# Altium PCB Logger_PCB_6.PcbDoc (part 1 of 2)
Units mm, origin at the board's own origin, x right, y up, seen from the top; angles counter-clockwise.
Board outline 91.13 x 59.14 mm, 2 copper layers (Top Layer, Bottom Layer); 117 components, 70 nets, 364 pads, 397 vias.
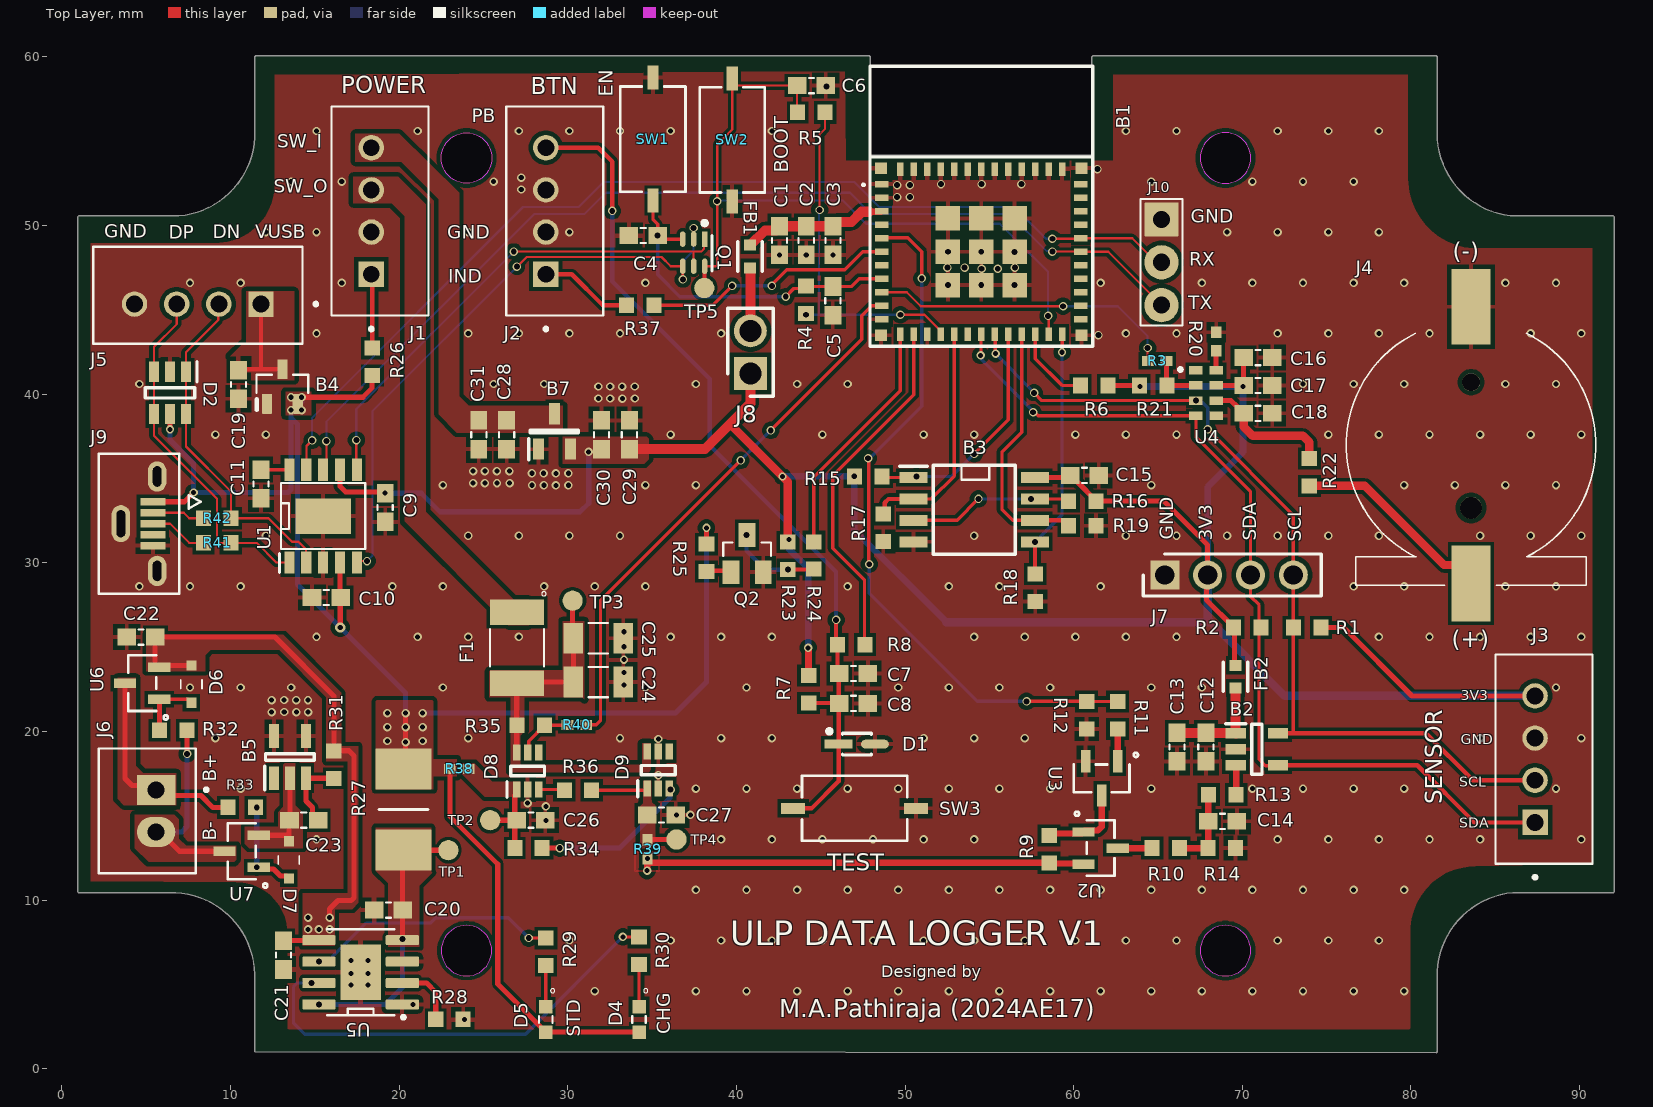
[diagram p0: Top Layer view]
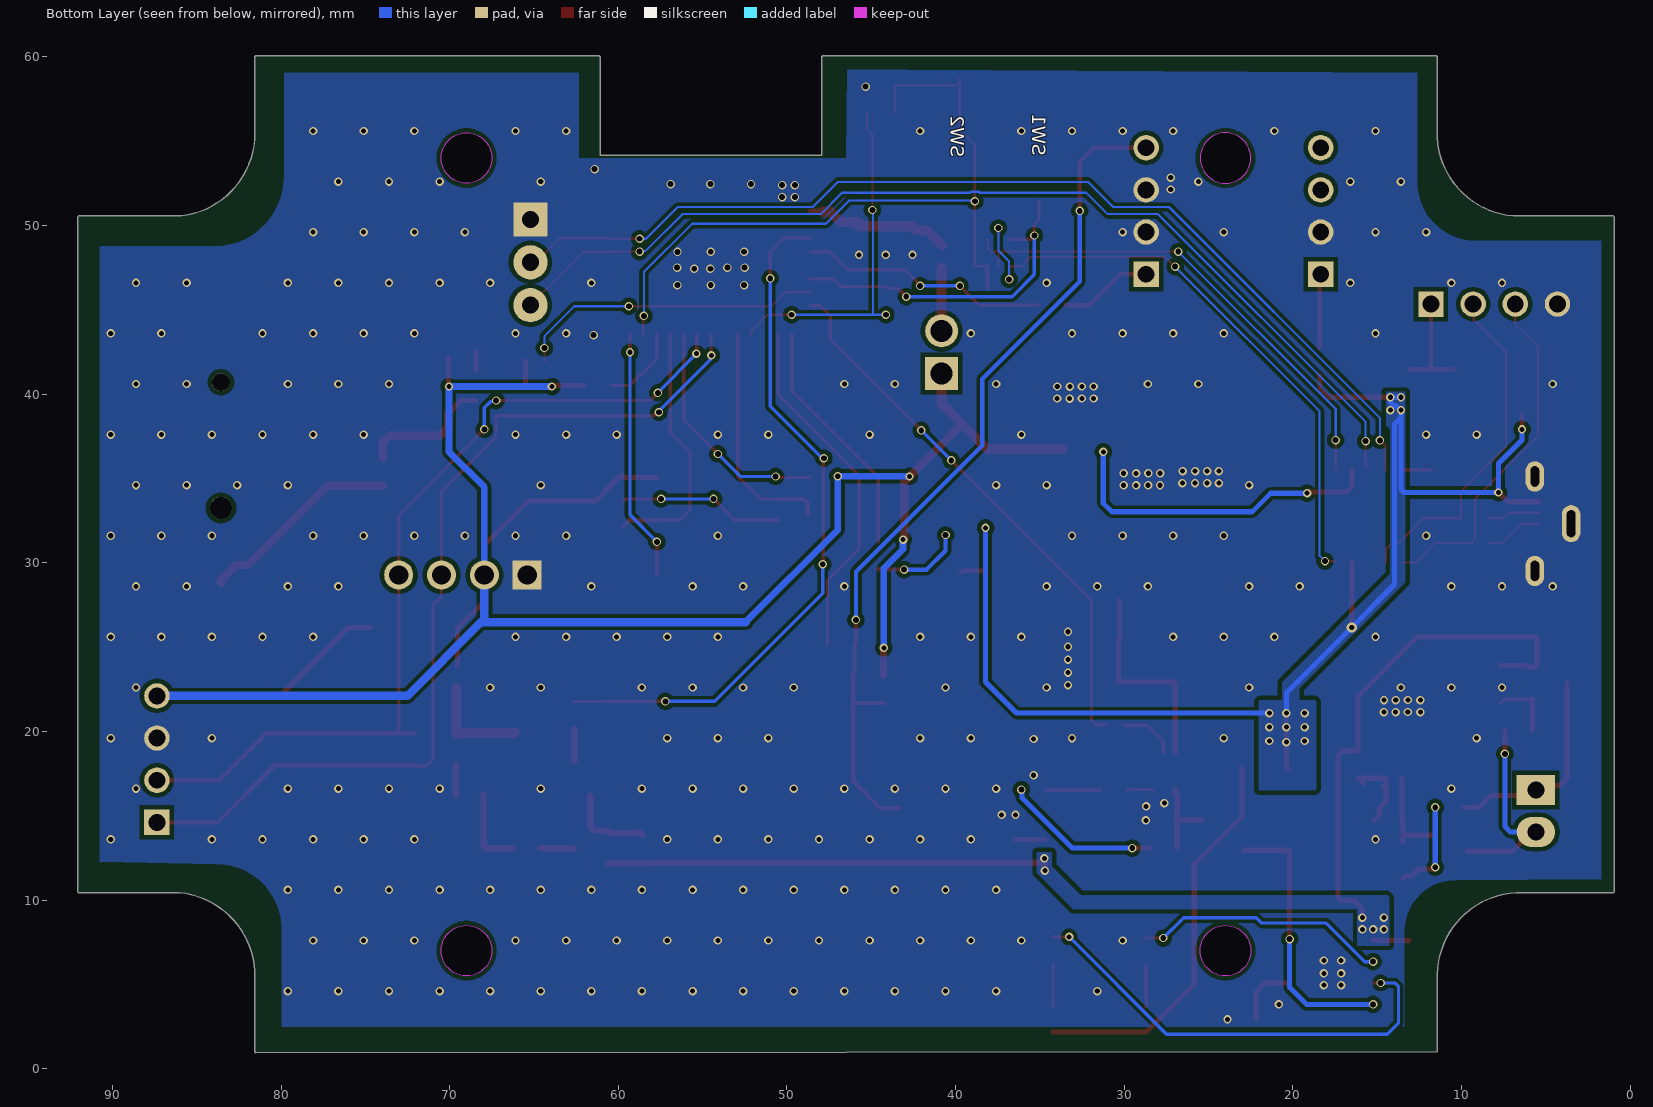
[diagram p1: Bottom Layer view, seen from below]
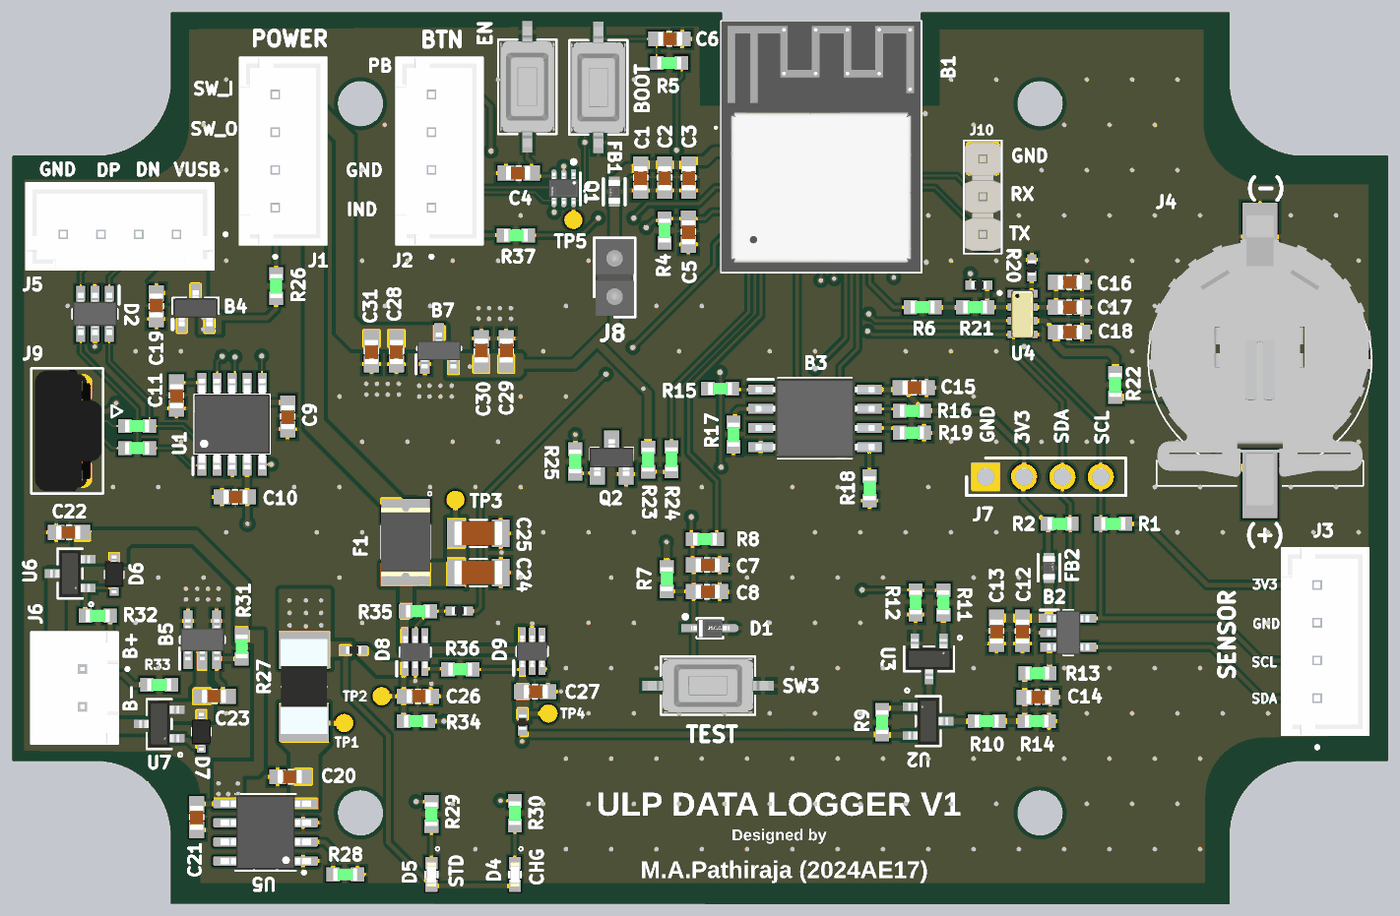
[diagram p3: 3D render of the assembled board from above, using the file's embedded part models]

## Layer stack, top to bottom
Top Solder: solder mask 0.0102, Solder Resist, Dk 3.5
Top Layer: signal copper 0.0356
Dielectric 1: dielectric 0.32, FR-4, Dk 4.8
Bottom Layer: signal copper 0.0356
Bottom Solder: solder mask 0.0102, Solder Resist, Dk 3.5

## Board outline
11.436,1 11.436,5.217 11.431,5.241 ccw(c6.482,5.489) 11.436,5.373 11.436,5.588 11.436,5.594 ccw(c6.482,5.489) 6.746,10.438 6.732,10.436 1,10.436 0.936,10.5 0.936,50.5 1.005,50.564 6.942,50.564 ccw(c6.5,55.5) 11.448,55.213 11.436,55.25 11.436,60 11.5,60.064 47.879,60.064 47.943,60 47.943,54.166 61.087,54.166 61.087,60.008 61.151,60.071 81.5,60.071 81.564,60 81.564,55.118 81.561,55.099 ccw(c86.502,55.482) 85.895,50.564 92,50.564 92.064,50.5 92.064,10.5 92,10.436 86.041,10.436 ccw(c86.509,5.502) 81.56,5.773 81.564,5.752 81.564,1 81.5,0.936
cut-out: 67.5,7 ccw(c69,7) 69,5.5 ccw(c69,7) 70.5,7 ccw(c69,7) 69,8.5 ccw(c69,7)
cut-out: 67.5,54 ccw(c69,54) 69,52.5 ccw(c69,54) 70.5,54 ccw(c69,54) 69,55.5 ccw(c69,54)
cut-out: 24,52.5 cw(c24,54) 22.5,54 cw(c24,54) 24,55.5 cw(c24,54) 25.5,54 cw(c24,54)
cut-out: 22.5,7 ccw(c24,7) 24,5.5 ccw(c24,7) 25.5,7 ccw(c24,7) 24,8.5 ccw(c24,7)

## Design rules (kind name [scope] priority, off if disabled: settings)
Clearance [All] p1: gap=0.254 ignorepadtopadclearanceinfootprint=TRUE except(0: Arc-Hole Track-Hole SMDPad-Hole THPad-Hole Via-Hole Fill-Hole Poly-Hole Region-Hole Text-Hole; 0.127: Arc-Arc Arc-Track Track-Track SMDPad-SMDPad; 0.2: Arc-SMDPad Arc-THPad Arc-Fill Arc-Poly Arc-Region Track-SMDPad Track-THPad Track-Fill Track-Poly Track-Region SMDPad-Fill SMDPad-Poly SMDPad-Region)
DiffPairsRouting [All] p1: maxlimit=0.127 minlimit=0.127 mostfreqgap=0.127 toplayer_minwidth=0.133 toplayer_maxwidth=0.133 toplayer_prefwidth=0.133 bottomlayer_minwidth=0.133 bottomlayer_maxwidth=0.133 bottomlayer_prefwidth=0.133 maxuncoupledlength=12.7
HoleSize [All] p1: absolutevalues=TRUE maxlimit=6.3 minlimit=0.025 maxpercent=80.000 minpercent=20.000
MinimumSolderMaskSliver [All] p1: minsoldermaskwidth=0.05
PolygonConnect PolygonConnect_1 [InNetClass('POWER_NET')] p1: connectstyle=Direct reliefconductorwidth=0.254 reliefentries=4 polygonreliefangle="90 Angle" airgapwidth=0.254
PolygonConnect [All] p2: thpad.connectstyle=Direct thpad.reliefconductorwidth=0.254 thpad.reliefentries=4 thpad.polygonreliefangle="90 Angle" thpad.airgapwidth=0.254 smdpad.connectstyle=Relief smdpad.reliefconductorwidth=0.254 smdpad.reliefentries=4 smdpad.polygonreliefangle="90 Angle" smdpad.airgapwidth=0.254 via.connectstyle=Direct via.reliefconductorwidth=0.254 via.reliefentries=4 via.polygonreliefangle="90 Angle" via.airgapwidth=0.254
RoutingVias RoutingVias_POWER [InNetClass('POWER_NET')] p1: holewidth=0.35 width=0.5 viastyle="Through Hole" minholewidth=0.3 minwidth=0.5 maxholewidth=0.711 maxwidth=1.27
RoutingVias [All] p2: holewidth=0.35 width=0.5 viastyle="Through Hole" minholewidth=0.35 minwidth=0.5 maxholewidth=0.35 maxwidth=0.5
SilkToSilkClearance [All] p1: silktosilkclearance=0.1
SilkToSolderMaskClearance [IsPad] p1: minsilkscreentomaskgap=0.05 clearancetoexposedcopper=TRUE
SolderMaskExpansion SolderMaskExpansion_1 [IsVia] p1: expansion=0.102 istentingtop=TRUE
SolderMaskExpansion [All] p2: expansion=0.102 istentingtop=FALSE
Width Power_class [InNetClass('POWER_NET')] p1: maxlimit=2 minlimit=0.305 preferedwidth=0.508 minimp=50.000000 maximp=50.000000 favimp=50.000000
Width [All] p2: maxlimit=2 minlimit=0.127 preferedwidth=0.254 minimp=50.000000 maximp=50.000000 favimp=50.000000
25 further rules are at their usual default settings.

## Classes and differential pairs
net class POWER_NET: 3V3D Mout REG_IN VBUS Vin2
component class Voltage_Regulator(ULP): B7 C28 C29 C30 C31
component class USB_Programmer: C9 C10 C11 U1
component class USB_CON: B4 C19 D2 J5 J9 Q2 R23 R24 R25 R41 R42
component class ULP_RTC: C16 C17 C18 J4 R20 R21 R22 U4
component class ULP_ADC: B2 C12 C13 C14 FB2 R9 R10 R11 R12 R13 R14 U2 U3
component class TopDesign: F1 J1 J2 J7 R1 R2 R3 R26 R37 R40
component class Temp_Sensor: J3
component class Power_MUX: C24 C25 C26 C27 D8 D9 R34 R35 R36 R38 R39 TP2 TP3 TP4
component class NOR_FLASH: B3 C15 R15 R16 R17 R18 R19
component class Designator: B1 C1 C2 C3 C4 C5 C6 FB1 J8 J10 Q1 R4 R5 R6 SW1 SW2 TP5
component class Battery_Protection: B5 C22 C23 D6 D7 J6 R31 R32 R33 U6 U7
component class Battery_Charger: C20 C21 D4 D5 R27 R28 R29 R30 TP1 U5

## Components (designator, comment, footprint, x,y, rotation, side; value= is the part's Value field where it differs from the comment)
B1 "ESP32-H2-MINI-1-N4" ESP32-H2-MINI-1-NX 54.521,51.14 r0 top
B2 "MCP3021" MCP3021A5T-E_OT 70.868,18.942 r0 top
B3 "W25Q64JVSSIQ" W25Q64JVSSIQ 54.102,33.147 r0 top
B4 "AP2331W-7" AP2331W-7-(SOT-23-3) 13.081,40.45 r90 top
B5 "DW03" DW03 13.525,18.479 r90 top
B7 "MCP1700T" MCP1700T-SOT23 29.21,37.782 r90 top
C1 "100 nF" CAP_0603 42.556,49.106 r90 top
C2 "22 uF" CAP_0603 44.143,49.106 r90 top
C3 "10 nF" CAP_0603 45.731,49.106 r90 top
C4 "100 nF" CAP_0603 34.48,49.403 r0 top
C5 "1 uF" CAP_0603 45.72,45.529 r90 top
C6 "100 nF" CAP_0603 44.45,58.293 r180 top
C7 "1 uF" CAP_0603 46.949,23.437 r180 top
C8 "100 nF" CAP_0603 46.949,21.659 r180 top
C9 "100 nF" CAP_0603 19.177,33.274 r90 top
C10 "100 nF" CAP_0603 15.684,27.94 r180 top
C11 "100 nF" CAP_0603 11.811,34.671 r90 top
C12 "1 uF" CAP_0603 67.84,19.066 r90 top
C13 "10 nF" CAP_0603 66.125,19.066 r90 top
C14 "100 nF" CAP_0603 68.834,14.668 r180 top
C15 "100 nF" CAP_0603 60.642,35.179 r180 top
C16 "1 uF" CAP_0603 70.929,42.164 r180 top
C17 "100 nF" CAP_0603 70.929,40.513 r180 top
C18 "1 uF" CAP_0603 70.929,38.862 r180 top
C19 "100 nF" CAP_0603 10.477,40.576 r270 top
C20 "10 uF" CAP_0603 19.367,9.398 r0 top
C21 "10 uF" CAP_0603 13.144,6.731 r90 top
C22 "10 uF" CAP_0603 4.699,25.59 r0 top
C23 "100 nF" CAP_0603 14.351,14.732 r0 top
C24 "47 uF" "CAP SMD 1206" 31.813,22.924 r180 top
C25 "100 uF" "CAP SMD 1206" 31.813,25.527 r180 top
C26 "1 uF" CAP_0603 27.813,14.732 r180 top
C27 "1 uF" CAP_0603 35.56,15.036 r180 top
C28 "2.2 uF" CAP_0603 26.378,37.592 r90 top
C29 "10 uF" CAP_0603 33.655,37.592 r270 top
C30 "100 nF" CAP_0603 32.004,37.592 r270 top
C31 "1 uF" CAP_0603 24.727,37.592 r90 top
D1 "BSD3A031V" MCC_SOD-323_IPC_A 47.14,19.246 r0 top
D2 "USBLC6-2SC6" USBLC6-2SC6 6.413,40.069 r270 top
D4 "RED" "LED SMD 0603" 34.227,2.921 r270 top
D5 "YELLOW" "LED SMD 0603" 28.702,2.921 r270 top
D6 "PESD5V0S1BA" TVS_SOD-323 7.683,22.796 r90 top
D7 "PESD5V0S1BA" TVS_SOD-323 13.462,12.383 r270 top
D8 "LM66100DCKR" LM66100DCKR 27.622,17.653 r90 top
D9 "LM66100DCKR" LM66100DCKR 35.369,17.703 r90 top
F1 "MF-MSMF050-2" Fuse_SMD_1812_1A 26.987,24.956 r270 top
FB1 "BLM18KG601SN1D" FBead_Murata_BLM18KG601SN1D 40.804,48.163 r270 top
FB2 "BLM18KG601SN1D" FBead_Murata_BLM18KG601SN1D 69.596,23.241 r90 top
J1 "JST_4P_P=2.5mm" JST_4P_Straight_P=2.5mm 18.877,50.86 r270 top
J2 "JST_4P_P=2.5mm" JST_4P_Straight_P=2.5mm 29.227,50.86 r270 top
J3 "JST_4P_P=2.5mm" JST_4P_Straight_P=2.5mm 87.884,18.351 r270 top
J4 "Bat_Con_CR1220" Bat_Con_CR1220 83.566,36.979 r0 top
J5 "JST_4P_P=2.5mm" JST_4P_Straight_P=2.5mm 8.061,45.864 r0 top
J6 "2_Way_JST" 2_Way_JST_Connector 5.588,15.284 r90 top
J7 "Pin_Header_2.54_4P" Pin_Header_2.54_4P 65.405,29.273 r0 top
J8 "Pin_Header_2.54_2P" Pin_Header_2.54_2P 40.831,41.212 r90 top
J9 "1051330011" USB_Micro_B_90_MOLEX_1051330011 4.577,32.316 r270 top
J10 "1x3_Header" 1x3_Header 65.215,47.816 r270 top
Q1 "UMH3NTN-(Dual Transistor With Base Res)" "UMH3NTN-(Dual Transistor With Base Res-SOT-363)" 37.465,48.387 r270 top
Q2 "MMBT2222*" "Bipolar _BJT_ Transistor" 40.64,30.543 r0 top
R1 "10 KOhm" Res_0603 73.85,26.162 r0 top
R2 "10 KOhm" Res_0603 70.294,26.162 r180 top
R3 "0 Ohm" RES_0402 64.96,41.974 r0 top
R4 "10 KOhm" Res_0603 44.133,45.593 r270 top
R5 "DNP" Res_0603 44.45,56.706 r0 top
R6 "3.3 KOhm" Res_0603 61.226,40.513 r0 top
R7 "33 KOhm" Res_0603 44.282,22.496 r90 top
R8 "1 KOhm" Res_0603 46.808,25.146 r0 top
R9 "100 KOhm" Res_0603 58.547,13.018 r270 top
R10 "33 KOhm" Res_0603 65.468,13.081 r180 top
R11 "4.7 KOhm" Res_0603 62.611,20.955 r90 top
R12 "10 KOhm" Res_0603 60.77,20.955 r270 top
R13 "1  KOhm" Res_0603 68.824,16.251 r180 top
R14 "100 KOhm" Res_0603 68.782,13.081 r180 top
R15 "10 KOhm" Res_0603 47.816,35.115 r180 top
R16 "10 KOhm" Res_0603 60.515,33.655 r0 top
R17 "100 KOhm" Res_0603 48.704,32.067 r90 top
R18 "100 KOhm" Res_0603 57.721,28.511 r90 top
R19 "100 KOhm" Res_0603 60.515,32.194 r180 top
R20 "DNP" RES_0402 68.453,43.116 r90 top
R21 "100 KOhm" Res_0603 64.706,40.513 r180 top
R22 "470 KOhm" Res_0603 73.977,35.369 r90 top
R23 "22KOhm" Res_0603 43.053,30.416 r270 top
R24 "1 KOhm" Res_0603 44.591,30.429 r270 top
R25 "10 KOhm" Res_0603 38.227,30.29 r90 top
R26 "470 Ohm" Res_0603 18.415,41.91 r270 top
R27 "0.2 Ohm , 1W" RES_2512 20.256,15.367 r270 top
R28 "1.33 KOhm , 1%" Res_0603 22.987,2.921 r180 top
R29 "1 KOhm" Res_0603 28.702,6.921 r270 top
R30 "1 KOhm" Res_0603 34.227,6.985 r270 top
R31 "100 Ohm" Res_0603 16.129,18.034 r90 top
R32 "10 KOhm" Res_0603 6.604,20.066 r180 top
R33 "10 KOhm" Res_0603 10.668,15.494 r180 top
R34 "100 Ohm" Res_0603 27.672,13.081 r0 top
R35 "1.5 MOhm" Res_0603 27.802,20.369 r0 top
R36 "100 Ohm" Res_0603 30.607,16.51 r0 top
R37 "560 Ohm" Res_0603 34.29,45.276 r0 top
R38 "DNP" RES_0402 23.558,17.78 r0 top
R39 "DNP" RES_0402 34.734,13.018 r90 top
R40 "0 Ohm" RES_0402 30.543,20.383 r180 top
R41 "DNP" Res_0603 9.207,31.178 r0 top
R42 "DNP" Res_0603 9.207,32.639 r0 top
SW1 "SPST_SMD_Tactile_sw" SPST_SMD_6mm 35.052,55.118 r90 top
SW2 "SPST_SMD_Tactile_sw" SPST_SMD_6mm 39.751,55.08 r270 top
SW3 "SPST_SMD_Tactile_sw" SPST_SMD_6mm 47.013,15.436 r0 top
TP1 "Test_Point" Test_Point 22.924,12.954 r180 top
TP2 "V1" Test_Point 25.4,14.732 r180 top
TP3 "Test_Point" Test_Point 30.29,27.749 r0 top
TP4 "V2" Test_Point 36.449,13.589 r180 top
TP5 "boot" Test_Point 38.1,46.291 r90 top
U1 "CH343K" CH343K 15.494,32.766 r90 top
U2 "SI2333CDS" SOT-23 61.595,13.081 r270 top
U3 "SI2302CDS" SOT-23 61.658,17.209 r180 top
U4 "RV-3028-C7" IC_RV-3028-C7 67.853,40.063 r0 top
U5 "TP4056" TP4056-SOP-8-EP 17.716,5.715 r180 top
U6 "SI2333CDS" SOT-23 4.763,22.86 r90 top
U7 "SI2302CDS" SOT-23 10.668,12.89 r90 top

## Footprints (in the part's own frame and the unit in brackets; to place one, negate y for a bottom-side part, rotate by r counter-clockwise, add the part's x,y. Pads: shape width x height; smd on the part's side, far side on the other; paste and mask are expansions set on the pad)
1x3_Header [mil] "1x3_Header, Length=284mil,  Width=95mil, Pitch=100mil, Height=315mil"
  rrect8% 80x80 hole 40: 1(-100,0)
  round 80 hole 40: 2(0,0) 3(100,0)
  silkscreen extent -148,-49 148,49, body extent -142,-47 141,47, height 322
2_Way_JST_Connector [mm] "2 Way JST Connector, Pitch=2.5mm"
  rect 1.778x2.286 hole 1: 1(1.25,0)
  oval 1.778x2.286 hole 1: 2(-1.25,0)
  silkscreen extent -3.7,-3.08 3.7,3.4, body extent -3.7,-2.35 3.7,3.4, height 7
AP2331W-7-(SOT-23-3) [mm] "AP2331W-7-(SOT-23-3)"
  rrect15% 1.18x0.61 smd: 1(-1.025,0.915) 2(-1.025,-0.915) 3(1.025,0)
  silkscreen extent -1.4,-1.53 0.7,1.53, body extent -1.2,-1.45 1.2,1.45, height 1.2
Bat_Con_CR1220 [mm]
  rect 2.3x4.5 smd: 1(0,-8.2) 2(0,8.2)
  round 1.3 hole 1.3 unplated: MP1(0,-3.725)
  round 1.05 hole 1.05 unplated: MP2(0,3.725)
  silkscreen extent -7.4,-8.31 7.4,6.63, body extent -7.37,-9.6 7.37,9.6, height 4.48
"Bipolar _BJT_ Transistor" [mm] "Bipolar _BJT_ Transistor NPN 30V 600mA 250MHz 350mW Surface Mount SOT-23-3"
  rect 1x1.4 smd: B(-0.95,-1.1) C(0,1.1) E(0.95,-1.1)
  silkscreen extent -1.42,-0.15 1.42,0.66, body extent -1.45,-1.2 1.45,1.2, height 1.11
"CAP SMD 1206" [mm] "CAP SMD 1206, Length 3.20"
  rect 1.16x1.82 smd: 1(-1.475,0) 2(1.475,0)
  silkscreen extent -0.57,-0.9 0.57,0.9, body extent -1.59,-0.8 1.61,0.8, height 0.88
CAP_0603 [mm]
  rect 1.1x1 smd: 1(-0.85,0) 2(0.85,0)
  silkscreen extent -0.15,-0.45 0.15,0.45, body extent -0.85,-0.45 0.75,0.45, height 0.79
CH343K [mm] "ESSOP-10-150mil-1mm"
  rect 2.1x3.3 smd paste-3: 0(0,0)
  rect 1.31x0.6 smd: 1(-2.75,2) 2(-2.75,1) 3(-2.75,0) 4(-2.75,-1) 5(-2.75,-2) 6(2.75,-2) 7(2.75,-1) 8(2.75,0) 9(2.75,1) 10(2.75,2)
  silkscreen extent -3.35,-2.5 1.95,2.59, body extent -3,-2.5 3,2.5, height 1.6
DW03 [mm] "SOT-23-5"
  rect 1.4x0.6 smd: 1(-1.25,0.95) 2(-1.25,0) 3(-1.25,-0.95) 4(1.25,-0.95) 5(1.25,0.95)
  silkscreen extent -1.95,-1.45 0.2,1.5, body extent -1.35,-1.45 1.35,1.45, height 1.45
ESP32-H2-MINI-1-NX [mm] "With_PCB_Antenna"
  rect 0.8x0.4 smd: 1(-5.9,1.3) 2(-5.9,0.5) 3(-5.9,-0.3) 4(-5.9,-1.1) 5(-5.9,-1.9) 6(-5.9,-2.7) 7(-5.9,-3.5) 8(-5.9,-4.3) 9(-5.9,-5.1) 10(-5.9,-5.9) 11(-5.9,-6.7) 25(5.9,-6.7) 26(5.9,-5.9) 27(5.9,-5.1) 28(5.9,-4.3) 29(5.9,-3.5) 30(5.9,-2.7) 31(5.9,-1.9) 32(5.9,-1.1) 33(5.9,-0.3) 34(5.9,0.5) 35(5.9,1.3)
  rect 0.4x0.8 smd: 12(-4.8,-7.6) 13(-4,-7.6) 14(-3.2,-7.6) 15(-2.4,-7.6) 16(-1.6,-7.6) 17(-0.8,-7.6) 18(0,-7.6) 19(0.8,-7.6) 20(1.6,-7.6) 21(2.4,-7.6) 22(3.2,-7.6) 23(4,-7.6) 24(4.8,-7.6) 36(4.8,2.2) 37(4,2.2) 38(3.2,2.2) 39(2.4,2.2) 40(1.6,2.2) 41(0.8,2.2) 42(0,2.2) 43(-0.8,2.2) 44(-1.6,2.2) 45(-2.4,2.2) 46(-3.2,2.2) 47(-4,2.2) 48(-4.8,2.2)
  rect 1.45x1.45 smd: 49(0,-2.7) 54(-1.975,-2.7) 55(-1.975,-4.675) 56(0,-4.675) 57(1.975,-4.675) 58(1.975,-2.7) 59(1.975,-0.725) 60(0,-0.725) 61(-1.975,-0.725)
  rect 0.7x0.7 smd: 50(5.95,2.25) 51(5.95,-7.65) 52(-5.95,-7.65) 53(-5.95,2.25)
  silkscreen extent -7.06,-8.3 6.6,8.3, body extent -6.62,-8.29 6.58,8.31, height 2.55
FBead_Murata_BLM18KG601SN1D [mm]
  rect 0.65x0.7 smd paste+0 mask+0: 1(-0.675,0) 2(0.675,0)
  silkscreen extent -0.87,-0.72 0.87,0.72, body extent -1.1,-0.58 1.1,0.58, height 0.95
Fuse_SMD_1812_1A [mm] "MF-MSMF050-2 1812 Resettable Fuses 1A"
  rect 1.5x3.2 smd: 1(-2.1,0) 2(2.1,0)
  silkscreen extent -3.33,-1.6 1.1,1.73, body extent -2.27,-1.62 2.27,1.62, height 1.1
IC_RV-3028-C7 [mm]
  rect 0.8x0.5 smd: 1(-0.6,1.35) 2(-0.6,0.45) 3(-0.6,-0.45) 4(-0.6,-1.35) 5(0.6,-1.35) 6(0.6,-0.45) 7(0.6,0.45) 8(0.6,1.35)
  silkscreen extent -1.62,1.3 -1.42,1.5, body extent -0.75,-1.6 0.75,1.6, height 0.8
JST_4P_Straight_P=2.5mm [mm] "JST_B4B-XH-A(LF)(SN)"
  rect 1.508x1.508 / inner round 1.508 / far side rect 1.508x1.508 hole 1: 1(3.75,-0.525)
  round 1.508 hole 1: 2(1.25,-0.525) 3(-1.25,-0.525) 4(-3.75,-0.525)
  silkscreen extent -6.2,-2.88 7.1,2.88, body extent -6.2,-2.88 6.2,2.88, height 7
"LED SMD 0603" [mm]
  rect 0.8x0.8 smd: 1(-0.75,0) 2(0.75,0)
  silkscreen extent -1.83,-0.4 0.2,0.53, body extent -0.8,-0.3 0.8,0.3, height 1
LM66100DCKR [mm]
  rect 0.95x0.45 smd: 1(-1.1,0.65) 2(-1.1,0) 3(-1.1,-0.65) 4(1.1,-0.65) 5(1.1,0) 6(1.1,0.65)
  silkscreen extent -1.58,-1 0.28,1.22, body extent -1.05,-1 1.05,1, height 1
MCC_SOD-323_IPC_A [mm]
  rrect100% 1.655x0.516 smd paste+0 mask+0: A(1.076,0)
  rect 1.655x0.516 smd paste+0 mask+0: C(-1.076,0)
  silkscreen extent -1.75,-0.65 0.85,0.88, body extent -2.4,-1.12 2.4,1.12, height 0.25
MCP1700T-SOT23 [mm] "MCP1700T-SOT23"
  rect 1.25x0.65 smd: 1(-1.05,0.95) 2(-1.05,-0.95) 3(1.05,0)
  silkscreen extent -1.68,-1.43 0.08,1.53, body extent -1.32,-1.42 1.05,1.44, height 1.12
MCP3021A5T-E_OT [mm] "SOT-23-5"
  rect 1.2x0.6 smd: 1(-1.25,0.95) 2(-1.25,0) 3(-1.25,-0.95) 4(1.25,-0.95) 5(1.25,0.95)
  silkscreen extent -1.85,-1.48 0.3,1.5, body extent -1.4,-1.48 1.4,1.48, height 1.45
Pin_Header_2.54_2P [mm] "Pin_Header_2.54_2P_Straight"
  rect 1.95x1.95 / inner round 1.95 / far side rect 1.95x1.95 hole 1.3: 1(0,0)
  round 1.95 hole 1.3: 2(2.54,0)
  silkscreen extent -1.35,-1.35 3.89,1.35, body extent -1.27,-1.27 3.81,1.27, height 8.54
Pin_Header_2.54_4P [mm] "323"
  rect 1.725x1.725 hole 1.15: 1(0,0)
  round 1.725 hole 1.15: 2(2.54,0) 3(5.08,0) 4(7.62,0)
  silkscreen extent -1.27,-1.24 9.27,1.24, body extent 2.67,-1.14 4.95,1.02, height 0.53
RES_0402 [mm] "Resistor SMD 0402 Package"
  rect 0.7x0.6 smd: 1(-0.55,0) 2(0.55,0)
  body extent -0.5,-0.25 0.5,0.25, height 0.35
Res_0603 [mm]
  rect 0.89x0.93 smd: 1(-0.814,0) 2(0.814,0)
  body extent -0.8,-0.4 0.8,0.4, height 0.55
RES_2512 [mm] "Resistor SMD 2512"
  rect 2.45x3.3 smd: 1(-2.4,0) 2(2.4,0)
  silkscreen extent 0,-1.45 0,1.45, body extent -3.15,-1.55 3.15,1.55, height 0.8
SOT-23 [mil] "N-MOSFET"
  rect 22x52 smd paste+0 mask+0: 1(-37.4,-40) 2(37.4,-40) 3(0,40)
  silkscreen extent -85,-60 65,33, body extent -60,-52 60,52, height 44
SPST_SMD_6mm [mil] "SPST SMD Tactile Switches 3.6mm X2.5m (6mm)"
  rect 56x26 smd paste+0 mask+0: 1(-143.5,0) 2(143.5,0)
  silkscreen extent -123,-76 123,76, body extent -157,-71 157,71, height 98
Test_Point [mm] "Refernece Point"
  round 1.2 smd paste-0.6: TP?(0,0)
TP4056-SOP-8-EP [mm]
  rrect25% 1.97x0.6 smd: 1(-2.475,1.905) 2(-2.475,0.635) 3(-2.475,-0.635) 4(-2.475,-1.905) 5(2.475,-1.905) 6(2.475,-0.635) 7(2.475,0.635) 8(2.475,1.905)
  rect 2.413x3.302 smd paste-3: 9(0,0)
  silkscreen extent -2.64,-2.55 2,2.77, body extent -3,-2.45 3,2.45, height 1.75
TVS_SOD-323 [mm]
  rect 0.6x0.6 smd: 1(-1.1,0) 2(1.1,0)
  silkscreen extent -0.25,-0.63 0.25,0.63, body extent -1.23,-0.63 1.25,0.62, height 0.93
"UMH3NTN-(Dual Transistor With Base Res-SOT-363)" [mm] "SOT-363"
  rect 0.909x0.336 smd paste+0 mask+0: 1(-0.802,0.65)
  rrect100% 0.909x0.336 smd paste+0 mask+0: 2(-0.802,0) 3(-0.802,-0.65) 4(0.802,-0.65) 5(0.802,0) 6(0.802,0.65)
  silkscreen extent -1.88,0.53 1.08,1.09, body extent -1.36,-1.1 1.36,1.1, height 0.25
USB_Micro_B_90_MOLEX_1051330011 [mm] "Brick nogging 5P Female Micro-B SMD USB Connector"
  rect 0.448x1.5 smd mask+0.064: 1(-1.3,0.825) 2(-0.65,0.825) 3(0,0.825) 4(0.65,0.825) 5(1.3,0.825)
  oval 1.8x1.1 hole 0.5 slot 1.2 at 0 deg mask+0.064: SH1(-2.8,1.075) SH3(2.8,1.075)
  oval 2.2x1.1 hole 0.5 slot 1.6 at 0 deg mask+0.064: SH2(0,-1.075)
  silkscreen extent -4.15,-2.37 4.15,3.65, body extent -4.03,-2.14 3.99,2.31, height 7.45
USBLC6-2SC6 [mm] "SOT-23-6L"
  rect 1.2x0.6 smd: 1(-1.25,0.95) 2(-1.25,0) 3(-1.25,-0.95) 4(1.25,-0.95) 5(1.25,0) 6(1.25,0.95)
  silkscreen extent -1.85,-1.46 0.3,1.6, body extent -1.4,-1.46 1.4,1.46, height 1.45
W25Q64JVSSIQ [mm] "SOIC-08"
  rect 1.65x0.65 smd: 1(-3.6,1.905) 2(-3.6,0.635) 3(-3.6,-0.635) 4(-3.6,-1.905) 5(3.6,-1.905) 6(3.6,-0.635) 7(3.6,0.635) 8(3.6,1.905)
  silkscreen extent -4.43,-2.64 2.42,2.67, body extent -3.95,-2.64 3.95,2.64, height 2.16

## Part data
B1: library part ESP32-H2-MINI-1-XX, "Multiprotocol Modules ENGINEERING SAMPLE Bluetooth Low Energy and IEEE 802.15.4  module with ESP32-H2 chip", LCSC=N-C18203134/U-C22470215, Manufacturer_Name="Espressif Systems", Datasheet Link=https://www.espressif.com/sites/default/files/documentation/esp32-h2-mini-1_mini-1u_datasheet_en.pdf, Geometry.Height=2.55mm, Manufacturer_Part_Number=ESP32-H2-MINI-1-N4
B2: library part MCP3021A5T-E_OT, "ADC - ,SAR, Single Ended ,10-bit ,I2C , 250uA-Active ,1uA -Standby", LCSC=C128576, Manufacturer_Name=Microchip, Manufacturer_Part_Number=MCP3021A5T-E/OT, Datasheet Link=https://lcsc.componentsearchengine.com/Datasheets/2/MCP3021A5T-E_OT.pdf, Foot Print=SOT-23-5, Geometry.Height=1.45mm
B3: "64Mb Serial NOR Flash 133MHz SOP864Mbit 2.7V~3.6V 133MHz SPI SOIC-8-208mil Memory (ICs) ROHS", LCSC=C179171, Manufacturer_Name=Winbond, Datasheet Link=https://www.winbond.com/hq/search-resource-file.jsp?partNo=W25Q64JVSSIQ&type=datasheet, Geometry.Height=2.16mm, Manufacturer_Part_Number=W25Q64JVSSIQ
B4: "High Side Current limited Load Switch 2.7V~5.2V 250mΩ 200mA", LCSC="SC-59 : C460346 , SOT23 :  C500764", Manufacturer_Name="Diodes Incorporated", Package="SC-59 , SOT-23", Datasheet Link=https://www.diodes.com//assets/Datasheets/AP2331.pdf, Geometry.Height=1.3mm, Manufacturer_Part_Number=AP2331W-7
B5: "2K 256X8 1.8V Ser.EEPROM,24AA02E48T-I/OT", LCSC=C18198382, Manufacturer_Name="HXY MOSFET", Datasheet Link=https://www.lcsc.com/datasheet/C18198382.pdf, Geometry.Height=1.45mm, Manufacturer_Part_Number=DW03
B7: library part MCP1700T-SOT23, "LDO voltage regulator 250mA Isupply 1.6uA", LCSC=C39051, MPN=Microchip, Datasheet Link=https://datasheet.datasheetarchive.com/originals/distributors/SFDatasheet-4/sf-00090030.pdf, Geometry.Height=1.12mm, Iq="1.6 uA", MFPN=MCP1700T-3302E/TT
C1 C2 C3 C4 C5 C6 C7 C8 C9 C10 C11 C12 C13 C14 C15 C16 C17 C18 C19 C24 C25 C26 C27 C28 C29 C30 C31: library part "Cap SMD", "Cap SMD."
C20 C21 C22 C23: library part Cap_SMD_New, "Cap Ceramic 1uF 10V X5R 10% Pad SMD 0402 85C T/R", Arrow Part Number=CL05A105KP5NNNC, Manufacturer_Name=SAMSUNG, Mouser Part Number=187-CL05A105KP5NNNC, Arrow Price/Stock=https://www.arrow.com/en/products/cl05a105kp5nnnc/samsung-electro-mechanics?region=nac, Datasheet Link=https://www.arrow.com/en/products/cl05a105kp5nnnc/samsung-electro-mechanics, Geometry.Height=0.55mm, Manufacturer_Part_Number=CL05A105KP5NNNC, Mouser Price/Stock=https://www.mouser.co.uk/ProductDetail/Samsung-Electro-Mechanics/CL05A105KP5NNNC?qs=X6jEic%2FHinBsUeNeR9HD7w%3D%3D
D1: library part TVS_Diode_Single, "TVS Diode (Uni-directional)", Arrow Part Number=SMAJ14A, Manufacturer_Name=LITTELFUSE, Mouser Part Number=576-SMAJ14A, Arrow Price/Stock=https://www.arrow.com/en/products/smaj14a/littelfuse?region=nac, Datasheet Link=https://componentsearchengine.com/Datasheets/2/SMAJ14A.pdf, Height=2.29mm, Manufacturer_Part_Number=SMAJ14A, Mouser Price/Stock=https://www.mouser.co.uk/ProductDetail/Littelfuse/SMAJ14A?qs=HR2RnyOI4E4Xmn1pka9YNw%3D%3D
D2: "5A 17V 6V Unidirectional 5.25V SOT-23-6L ESD and Surge Protection (TVS/ESD) ROHS , 2 data-line USB 2.0 protection, Protects VBUS, capacitance: 3.5 pF", LCSC=C7519, MPN="ST Micro Electronics", Package=SOT-23-6L, Application="USB 2.0 , Data & Power Protection", Datasheet=https://www.st.com/resource/en/datasheet/usblc6-2.pdf, MFPN=USBLC6-2SC6
D4 D5: library part "LED SMD", "SMD LED"
D6 D7: library part TVS_Diode_Bi-Direcctional, "Diode ESD (Bi-directional)", Arrow Part Number=PESD12VL1BA,115, Manufacturer_Name=Nexperia, Mouser Part Number=771-PESD12VL1BA-T/R, Arrow Price/Stock=https://www.arrow.com/en/products/pesd12vl1ba115/nexperia?region=europe, Datasheet Link=https://assets.nexperia.com/documents/data-sheet/PESDXL1BA_SER.pdf, Height=1.1mm, Manufacturer_Part_Number=PESD12VL1BA,115, Mouser Price/Stock=https://www.mouser.co.uk/ProductDetail/Nexperia/PESD12VL1BA115?qs=LOCUfHb8d9tizc9iojOZUw%3D%3D
D8 D9: "+/-6-V, Low IQ ideal diode with input polarity protection", LCSC=C2869734, Manufacturer_Name="Texas Instruments", Datasheet Link=http://www.ti.com/lit/gpn/LM66100, Geometry.Height=1.1mm, Manufacturer_Part_Number=LM66100DCKR
F1: "Polymeric PTC Resettable Fuse 15V 500 mA Ih Surface Mount 1812 (4532 Metric), Concave", Package="1812 Bourns", Availability="In Stock", Check_prices=https://www.snapeda.com/parts/MF-MSMF050-2/Bourns+-+J.W.+Miller/view-part/?ref=eda, MF=Bourns, MP=MF-MSMF050-2, Price=None, Purchase-URL=https://pricing.snapeda.com/search/part/MF-MSMF050-2/?ref=eda, SnapEDA_Link=https://www.snapeda.com/parts/MF-MSMF050-2/Bourns+-+J.W.+Miller/view-part/?ref=snap
J1 J2 J3 J5: "Connector Header Through Hole 4 position 0.098 (2.50mm)", Package=None, Check_prices=https://www.snapeda.com/parts/B4B-XH-A(LF)(SN)/JST+Sales+America+Inc./view-part/?ref=eda, MF="JST Sales", MP=B4B-XH-A(LF)(SN), SnapEDA_Link=https://www.snapeda.com/parts/B4B-XH-A(LF)(SN)/JST+Sales+America+Inc./view-part/?ref=snap
J4: "Connector", LCSC=C969906, Manufacturer_Name=Harwin, Manufacturer_Part_Number=S8411-45R, Mouser Part Number=855-S8411-45R, Datasheet Link=https://cdn.harwin.com/pdfs/S8411R.pdf, Mouser Price/Stock=https://www.mouser.co.uk/ProductDetail/Harwin/S8411-45R?qs=Qom7kyPojXY6B0JhnWxDgQ%3D%3D
J6: library part 2_Way_JST_Connector, "Connector Header Through Hole 2 position 0.098 (2.50mm)", Package=None, Availability="In Stock", Check_prices=https://www.snapeda.com/parts/B2B-XH-A(LF)(SN)/JST%20Sales%20America%20Inc./view-part/492310/?ref=eda, MF="JST Sales", MP=B2B-XH-A(LF)(SN), Price=None, SnapEDA_Link=https://www.snapeda.com/parts/B2B-XH-A(LF)(SN)/JST%20Sales%20America%20Inc./view-part/492310/?ref=snap
J7: "Pin_Header_2.54_2P X 4 MF: 22-28-4050", Manufacturer_Name=Molex, Manufacturer_Part_Number=22-28-4050, Mouser Part Number=538-22-28-4050, Datasheet Link=http://www.mouser.com/ds/2/276/0022284050_PCB_HEADERS-228092.pdf, Height=8.38mm, Mouser Price/Stock=https://www.mouser.co.uk/ProductDetail/Molex/22-28-4050?qs=MuwpYaHj752E1%2FBLq%2Fipmg%3D%3D
J8: "Pin_Header_2.54_2P_Straight", LCSC=C492401, Manufacturer_Name="Wurth Elektronik", Manufacturer_Part_Number=61300211121, Datasheet Link=https://componentsearchengine.com/Datasheets/2/61300211121.pdf, Geometry.Height=8.54mm
J9: "USB - micro B USB 2.0 Receptacle Connector 5 Position Surface Mount", Package=None, Check_prices=https://www.snapeda.com/parts/1051330011/Molex/view-part/?ref=eda, MF=Molex, MP=1051330011, SnapEDA_Link=https://www.snapeda.com/parts/1051330011/Molex/view-part/?ref=snap
Q1: "UMH3NTN-(Dual Transistor With Base Res = 4.7K) , 100@1mA,5V 150mW 100mA 50V SOT-363 Digital Transistors ROHS", LCSC=C123008, MPN=ROHM, Datasheet=https://www.lcsc.com/datasheet/C123008.pdf, MFPN=UMH3NTN
Q2: "Bipolar _BJT_ Transistor NPN 30V 600mA 250MHz 350mW Surface Mount SOT-23-3", Package="SOT-23-3 Fairchild Semiconductor", Availability=Unavailable, MF="ON Semiconductor", MP=MMBT2222, Price=None, SnapEDA_Link=https://www.snapeda.com/parts/MMBT2222/ON%20Semiconductor/view-part/214298/?ref=snap
R1 R2 R3 R4 R5 R6 R7 R8 R9 R10 R11 R12 R13 R14 R15 R16 R17 R18 R19 R20 R21 R22 R23 R24 R25 R26 R27 R28 R29 R30 R31 R32 R33 R34 R35 R36 R37 R38 R39 R40 R41 R42: library part "Res smd", "SMD Resistor", Package="2012 Rohm Semiconductor", Availability=Unavailable, MF=Yageo, MP=RC0805FR-07330RL, Price=None, SnapEDA_Link=https://www.snapeda.com/parts/RC0805FR-07330RL/Yageo/view-part/106115/?ref=snap
SW1 SW2 SW3: "SPST SMD Tactile Switches Rectangle button Brick nogging", Mfr_Name="XKB Connectivity"
TP2 TP4 TP5: library part Test_Point
U1: "USB to UART USB 2.0 ESSOP-10-150mil-1mm Interface Controllers ROHS", LCSC=C5832295, Package=ESSOP-10, Check_prices=https://www.lcsc.com/product-detail/C5832295.html?s_z=n_CH343, Datasheet=https://www.lcsc.com/datasheet/C5832295.pdf, MF=WCH, MP=CH343K
U2 U6: "P-Channel  MOSFET Vds=12V ,RDS(on)=35mOhm .  at VGS = 4.5 V", LCSC=C48179, Mfr_Name=Vishay, Type=P-MOSFET
U3 U7: "N-Channel  MOSFET Vds=20V ,RDS(on)=57mOhm .  at VGS = 4.5 V", LCSC=C10488, Mfr_Name=Vishay, Type=N-MOSFET
U4: "Real Time Clock (RTC) IC Clock/Calendar 2B, 43B IÂ²C, 2-Wire Serial 8-WCDFN", LCSC=C3304278, Package=SMD3215-8P, MF="Micro Crystal", MFPN="RV-3028-C7 32.768KHZ 1PPM-TA-QA", SnapEDA_Link=https://www.snapeda.com/parts/RV-3028-C7%2032.768KHZ%201PPM-TA-QA/Micro+Crystal/view-part/?ref=snap
U5: "Complete single cell Li-Ion battery with a constant current / constant voltage linear charger(SOP 8)", LCSC=C7473158, Datasheet=https://dlnmh9ip6v2uc.cloudfront.net/datasheets/Prototyping/TP4056.pdf, MFPN=TP4056

## Via types
v1: diameter 0.5, hole 0.3, Top Layer to Bottom Layer, tented both sides, 325 vias
v2: diameter 0.5, hole 0.35, Top Layer to Bottom Layer, tented both sides, 71 vias
v3: diameter 0.6, hole 0.3, Top Layer to Bottom Layer, tented both sides, 1 vias

## Nets (pads, with @x,y where several pads share a name; then routed paths per layer and width w, separated by ;. In a path a pad name is that pad's centre, name@x,y a point inside that pad or via, vN(x,y) a via of type N, cw(c..) or ccw(c..) an arc to the next point about the centre after c; other vN are vias at no path point)
3V3_ESP: B1.3 C1.2 C2.2 C3.2 FB1.1 | length 8.8
  Top Layer w0.4: 47.864,50.815 B1.3@48.596,50.815
  Top Layer w0.6: FB1.1@40.804,48.838 40.829,48.838 41.698,49.706 42.356,49.706 42.556,49.906 C1.2@42.556,49.956 C2.2@44.143,49.956 45.531,49.956 C3.2@45.731,50.156 ; C3.2@45.731,49.956 45.731,50.006 45.931,50.206 46.822,50.206 47.431,50.815 47.864,50.815
3V3D: B3.8 B7.2 C9.2 C15.2 C16.2 C17.2 C29.2 C30.2 FB2.2 J3.4 J7.2 J8.1 R1.2 R2.2 R6.2 R7.2 R15.2 R16.2 R21.2 R23.1 U1.7 U4.7 | length 158.7
  Top Layer w0.305: U1.7@16.494,35.516 16.494,34.532 16.822,34.204 C9.2@19.097,34.204 ; v1(19.152,34.124) C9.2@19.177,34.124 ; B3.8@57.702,35.052 59.665,35.052 C15.2@59.792,35.179 59.842,35.179 60.19,34.832 60.19,34.814 61.329,33.675 R16.2@61.329,33.655 65.341,33.655 67.945,31.051 J7.2@67.945,29.273 67.882,29.21 67.882,27.781 69.481,26.182 R2.2@69.481,26.162 69.538,26.104 69.538,23.974 FB2.2@69.596,23.916 ; R6.2@62.039,40.513 R21.2@63.893,40.513 ; U4.7@68.453,40.513 C17.2@70.04,40.513 ; C17.2@70.079,40.513 C16.2@70.079,42.164 ; R1.2@74.664,26.162 76.01,26.162 80.07,22.102 J3.4@87.359,22.102
  Top Layer w0.4: v1(44.259,24.956) 44.282,24.933 R7.2@44.282,23.31 ; v1(46.99,35.127) R15.2@47.002,35.115
  Top Layer w0.5: 39.624,38.227 43.053,34.798 R23.1@43.053,31.369
  Top Layer w0.6: C29.2@33.655,36.742 38.139,36.742 39.624,38.227 40.831,39.433 J8.1@40.831,41.212
  Bottom Layer w0.305: v1(19.152,34.124) 21.311,34.124 22.415,33.02 30.734,33.02 31.242,33.528 v1(31.242,36.576)
  Bottom Layer w0.4: v1(42.735,35.115) 42.747,35.127 v1(46.99,35.127) 46.99,31.941 52.451,26.479 ; v1(43.116,31.369) 43.116,30.797 44.259,29.654 v1(44.259,24.956) ; v1(63.944,40.45) v1(70.04,40.45) 70.04,36.576 67.945,34.48 J7.2@67.945,29.273
  Bottom Layer w0.5: 52.451,26.479 68.135,26.479 ; J7.2@67.945,29.273 67.945,26.67 68.135,26.479 ; J3.4@87.359,22.102 72.513,22.102 68.135,26.479
ADC_ON: B1.5 R11.2 R12.1 | length 41.8
  Top Layer w0.2: v2(47.816,36.195) 47.847,36.163 47.847,29.94 v2(47.879,29.909) ; B1.5@48.621,49.24 48.649,49.212 48.712,49.276 50.165,49.276 50.99,48.45 v2(50.99,46.863) ; v2(57.213,21.78) 60.758,21.78 R12.1@60.77,21.769 R11.2@62.611,21.769
  Bottom Layer w0.2: v2(47.816,36.195) 47.897,36.195 50.99,39.289 v2(50.99,46.863) ; v2(47.879,29.909) 47.879,28.194 54.292,21.78 v2(57.213,21.78)
B-: B5.2 C23.1 D7.1 U7.2 | length 5.6
  Top Layer w0.305: U7.2@11.684,13.841 13.462,13.841 ; D7.1@13.462,13.483 13.462,13.841 ; B5.2@13.525,17.228 13.525,14.757 C23.1@13.501,14.732 13.462,14.693 13.462,13.841
BAT_N: J6.2 R32.1 U7.3 | length 12.2
  Top Layer w0.305: J6.2@5.588,14.034 5.842,14.034 6.985,12.89 U7.3@9.652,12.89 ; R32.1@7.418,20.066 7.424,20.06 7.424,18.675 v2(7.429,18.669)
  Bottom Layer w0.305: J6.2@5.588,14.034 7.112,14.034 7.429,14.351 v2(7.429,18.669)
BAT_P: J6.1 R33.2 U6.3 | length 12.6
  Top Layer w0.305: U6.3@3.746,22.86 3.746,17.209 4.166,16.789 5.333,16.789 5.929,16.192 6.056,16.319 6.183,16.192 8.255,16.192 8.954,15.494 R33.2@9.854,15.494
BOOT: B1.23 C6.2 Q1.6 R5.1 SW2.1 TP5.TP? | length 44.2
  Top Layer w0.127: Q1.6@38.115,47.585 38.788,47.585 38.862,47.66 v2(38.862,51.435) 38.862,54.8 39.751,55.689 SW2.1@39.751,58.56 ; SW2.1@39.751,58.725 SW2.1@39.751,58.56 ; R5.1@43.636,56.706 43.6,56.742 C6.2@43.6,58.293 40.018,58.293 SW2.1@39.751,58.56 ; v2(58.483,44.64) 58.521,44.603 B1.23@58.521,43.54
  Top Layer w0.254: TP5.TP?@38.1,46.291 38.108,46.299 38.108,47.578 Q1.6@38.115,47.585
  Bottom Layer w0.127: v2(38.862,51.435) 38.91,51.483 46.307,51.483 47.688,50.102 55.626,50.102 58.483,47.244 v2(58.483,44.64)
BTN: B1.13 R8.2 | length 21.2
  Top Layer w0.2: R8.2@47.622,25.146 47.594,25.174 47.594,28.987 45.72,30.861 45.72,35.168 50.521,39.969 B1.13@50.521,43.54
CHIP_PU: B1.8 C4.2 C5.2 Q1.3 R4.1 SW1.1 | length 20.4
  Top Layer w0.2: SW1.1@35.052,51.473 35.052,50.355 35.331,50.077 v2(35.331,49.403) 35.545,49.189 Q1.3@36.815,49.189 ; v2(42.926,45.783) 43.403,46.261 43.986,46.261 R4.1@44.133,46.407 44.16,46.38 C5.2@45.72,46.38 46.813,46.38 47.273,46.84 B1.8@48.621,46.84
  Bottom Layer w0.2: v2(35.331,49.403) 35.331,47.092 36.639,45.783 v2(42.926,45.783)
CHRG: R30.1 U5.7 | length 26.9
  Top Layer w0.2: v2(14.795,5.08) U5.7@15.242,5.08 ; v1(33.274,7.81) 34.215,7.81 R30.1@34.227,7.799
  Bottom Layer w0.2: v2(14.795,5.08) 13.97,5.08 13.735,4.845 13.735,2.711 14.414,2.032 27.495,2.032 v1(33.274,7.81)
CLK: B1.21 B3.6 R19.2 | length 15.2
  Top Layer w0.2: B1.21@56.921,43.54 56.921,37.744 55.753,36.576 55.753,33.147 56.388,32.512 B3.6@57.702,32.512
  Top Layer w0.254: B3.6@57.702,32.512 59.384,32.512 R19.2@59.702,32.194
CS: B1.20 B3.1 R15.1 | length 13.8
  Top Layer w0.2: R15.1@48.629,35.115 48.693,35.052 B3.1@50.502,35.052 ; v2(54.102,36.449) 56.121,38.468 B1.20@56.121,43.54
  Bottom Layer w0.2: v2(50.673,35.115) 52.768,35.115 v2(54.102,36.449)
DTR_USB: Q1.1 Q1.5 U1.6 | length 29.6
  Top Layer w0.127: v2(17.462,37.274) 17.462,35.548 U1.6@17.494,35.516 ; v2(26.797,48.45) 37.391,48.45 ; Q1.5@37.465,47.585 37.465,48.376 37.391,48.45 ; Q1.1@38.115,49.189 38.077,49.151 38.077,48.618 37.91,48.45 37.391,48.45
  Bottom Layer w0.127: v2(17.462,37.274) 17.462,39.116 v2(26.797,48.45)